# Altium PCB 驱动PCB模型2.PcbDoc
Units mil, origin at the board's own origin, x right, y up, seen from the top; angles counter-clockwise.
Board outline 10400 x 7050 mil, 2 copper layers (Top Layer, Bottom Layer); 4 components, 0 nets, 36 pads, 0 vias.
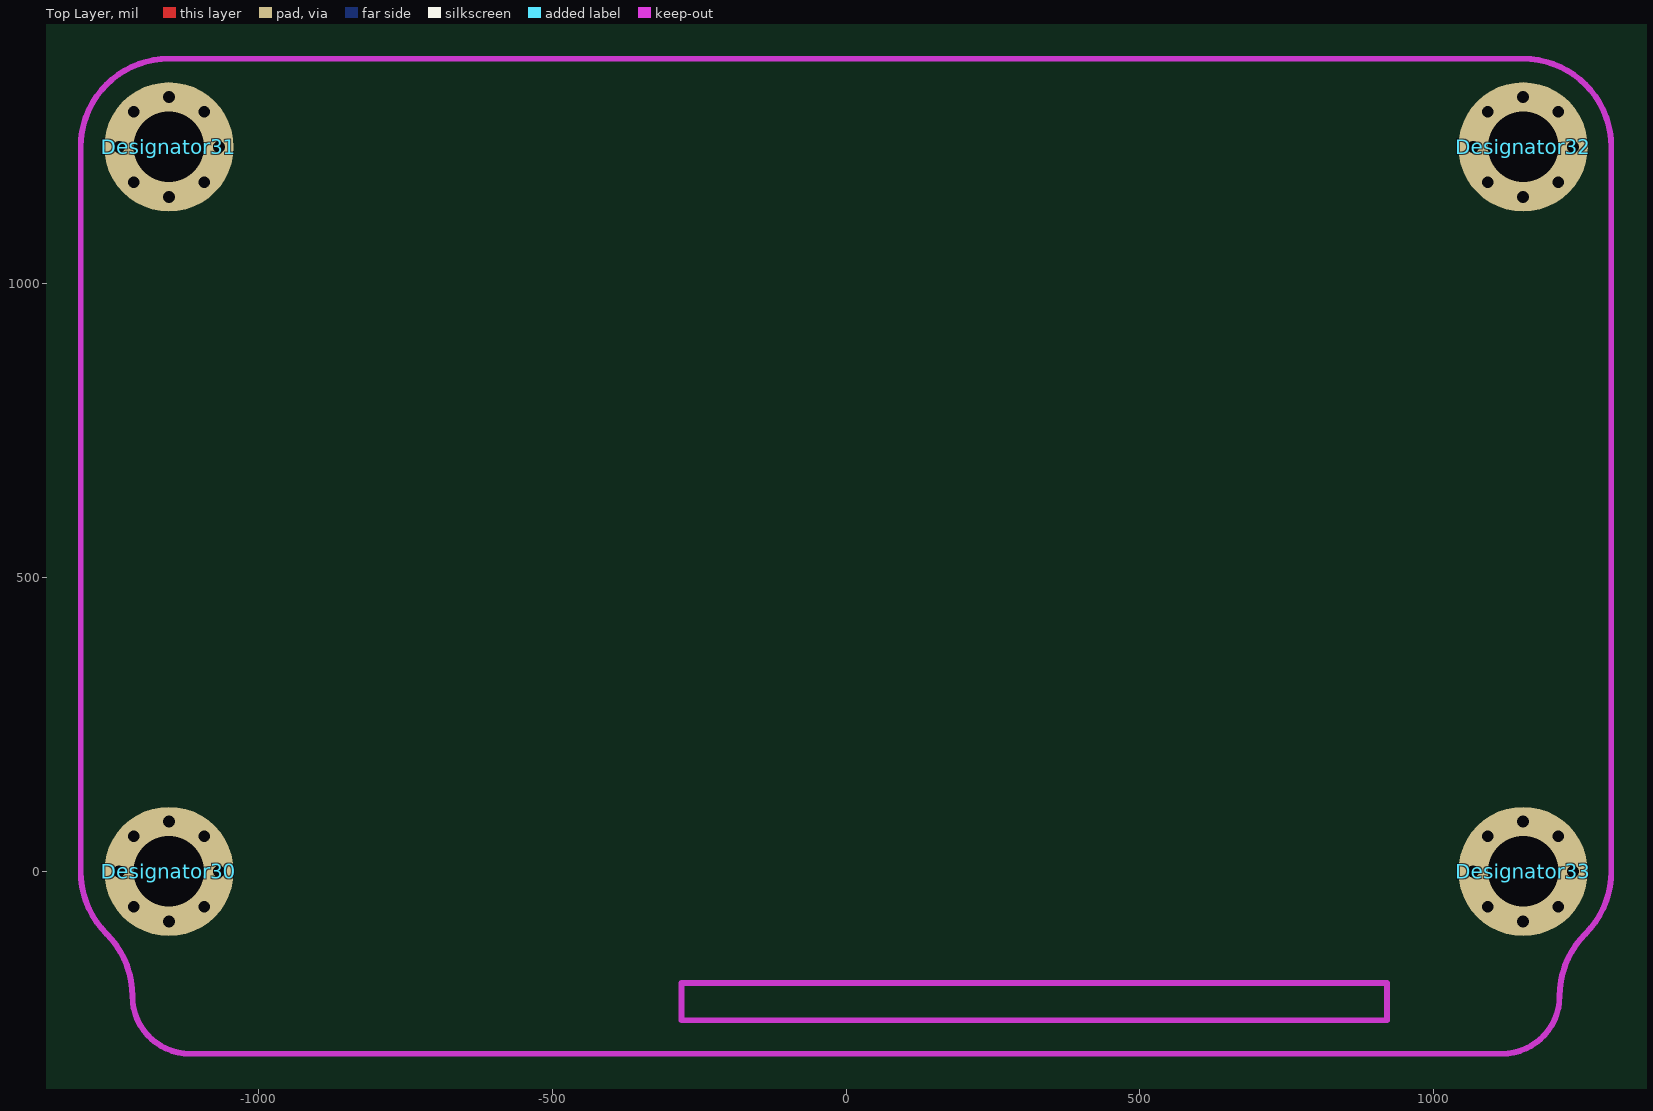
[diagram p0: Top Layer view]
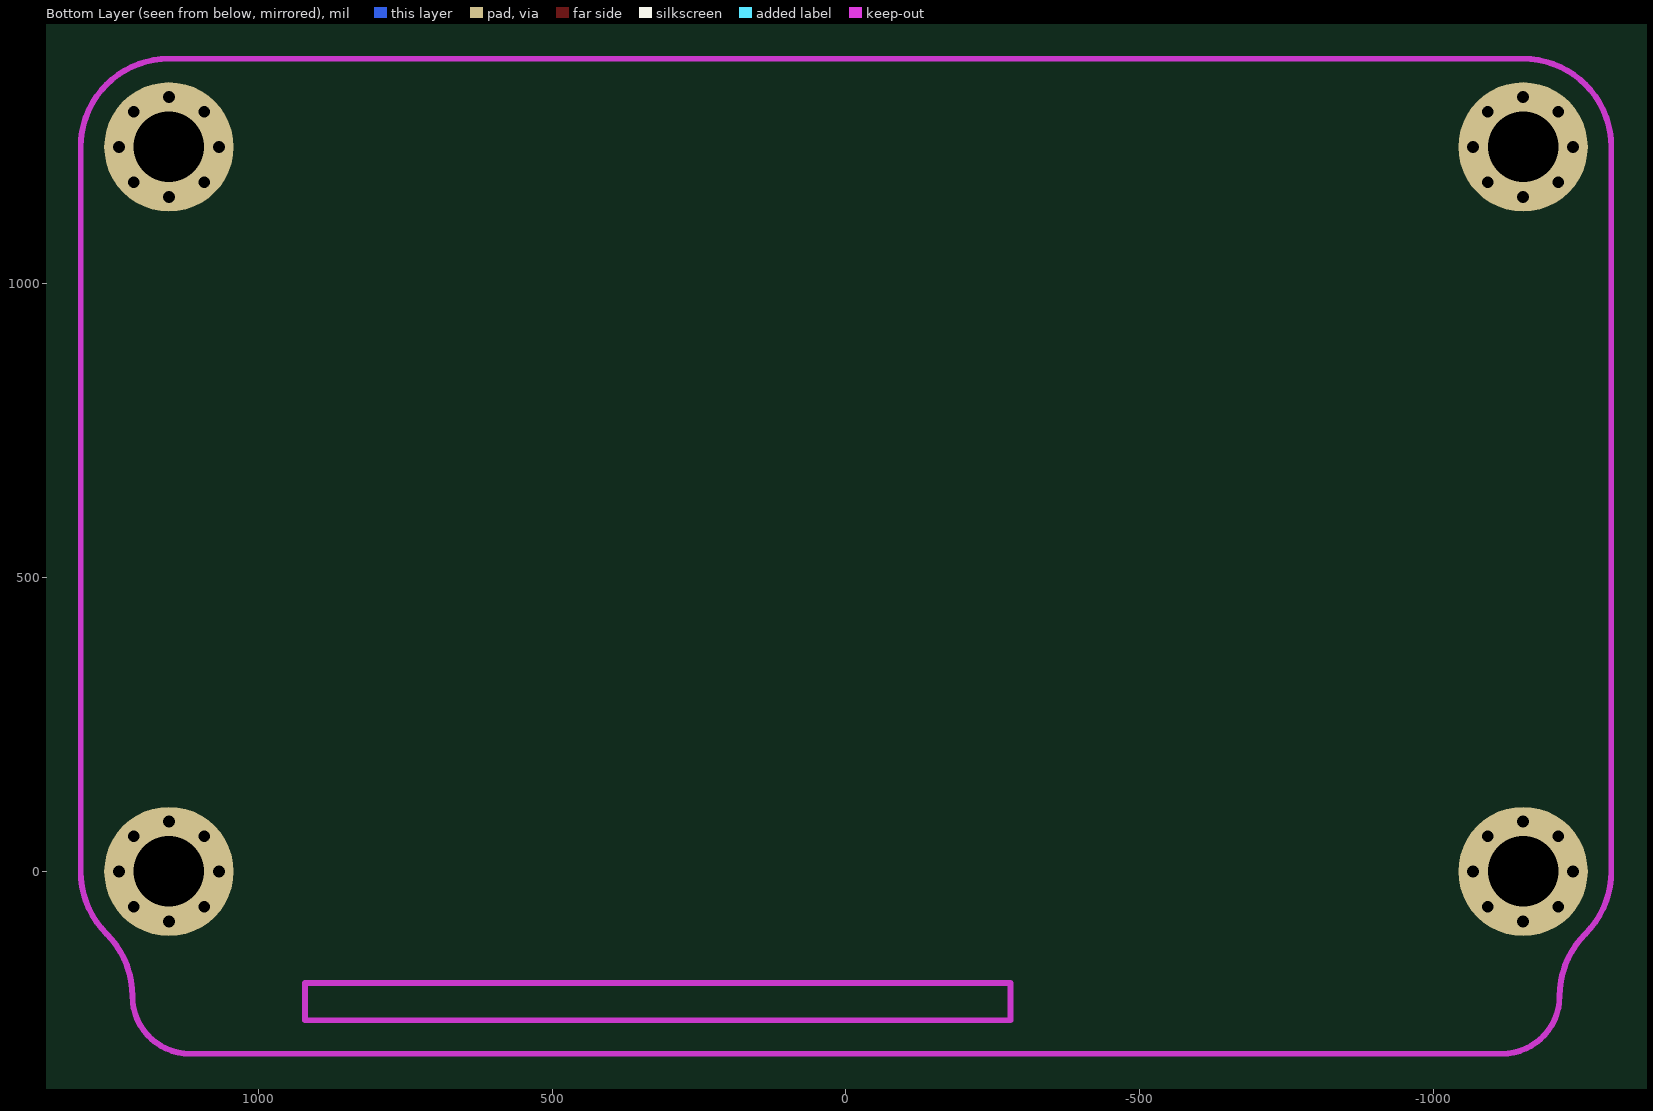
[diagram p1: Bottom Layer view, seen from below]

## Layer stack, top to bottom
Top Solder: solder mask 0.4, Solder Resist, Dk 3.5
Top Layer: signal copper 1.4
Dielectric 1: dielectric 12.6, FR-4, Dk 4.8
Bottom Layer: signal copper 1.4
Bottom Solder: solder mask 0.4, Solder Resist, Dk 3.5

## Board outline
-2836.57,-3020 -2836.57,4030 7563.43,4030 7563.43,-3020

## Design rules (kind name [scope] priority, off if disabled: settings)
Clearance [All] p1: gap=8
ComponentClearance [All] p1: gap=0 collisioncheckmode=3 verticalgap=0 showdistances=FALSE
HoleSize [All] p1: absolutevalues=TRUE maxlimit=200 minlimit=5 maxpercent=80.000 minpercent=20.000
PlaneClearance [All] p1: clearance=10
PlaneConnect [All] p1: planeconnectstyle=Direct reliefexpansion=20 reliefentries=4 reliefconductorwidth=10 reliefairgap=10
PolygonConnect [All] p1: connectstyle=Direct reliefconductorwidth=10 reliefentries=4 polygonreliefangle="90 Angle" airgapwidth=10
RoutingVias [All] p1: holewidth=15 width=25 viastyle="Through Hole" minholewidth=5 minwidth=10 maxholewidth=180 maxwidth=200
ShortCircuit [InNet('No Net') vs InNet('No Net')] p1: allowed=TRUE
SilkToSilkClearance [All] p1: silktosilkclearance=0
SolderMaskExpansion [All] p1: expansion=4
Width [All] p1: maxlimit=200 minlimit=8 preferedwidth=100
24 further rules are at their usual default settings.

## Components (designator, comment, footprint, x,y, rotation, side; value= is the part's Value field where it differs from the comment)
Designator30 "Comment" 螺丝固定过孔 -1151.57,0 r0 top
Designator31 "Comment" 螺丝固定过孔 -1151.57,1232.28 r0 top
Designator32 "Comment" 螺丝固定过孔 1151.57,1232.28 r0 top
Designator33 "Comment" 螺丝固定过孔 1151.57,0 r0 top

## Footprints (in the part's own frame and the unit in brackets; to place one, negate y for a bottom-side part, rotate by r counter-clockwise, add the part's x,y. Pads: shape width x height; smd on the part's side, far side on the other; paste and mask are expansions set on the pad)
螺丝固定过孔 [mil] "螺丝固定过孔"
  round 30 hole 20: 1(-85,0) 1(-60,-60) 1(-60,60) 1(0,-85) 1(0,85) 1(60,-60) 1(60,60) 1(85,0)
  round 220 hole 120 unplated: 1(0,0)

## Nets (pads, with @x,y where several pads share a name; then routed paths per layer and width w, separated by ;. In a path a pad name is that pad's centre, name@x,y a point inside that pad or via, vN(x,y) a via of type N, cw(c..) or ccw(c..) an arc to the next point about the centre after c; other vN are vias at no path point)
pads on no net: Designator30.1 Designator31.1 Designator32.1 Designator33.1

## Keep-outs
Keep-Out Layer:
  lines w10: -1301.58,0 ccw(c-1151.57,0) -1257.64,-106.07 cw(c-1363.71,-212.13) -1213.71,-212.13 ccw(c-1115.84,-212.13) -1115.84,-310 1115.84,-310 ccw(c1115.84,-212.13) 1213.71,-212.13 cw(c1363.71,-212.13) 1257.64,-106.07 ccw(c1151.57,0) 1301.58,0 1301.57,1232.28 ccw(c1151.57,1232.28) 1151.57,1382.28 -1151.57,1382.28 ccw(c-1151.57,1232.28) -1301.57,1232.28 -1301.57,0 ; -280,-252.99 920,-252.99 920,-190 -280,-190 -280,-252.99